# Altium PCB PCB1.PcbDoc
Units mil, origin at the board's own origin, x right, y up, seen from the top; angles counter-clockwise.
Board outline 6000 x 4000 mil, 2 copper layers (Top Layer, Bottom Layer); 75 components, 69 nets, 350 pads, 2 vias.
Unrouted connection lines stored in the file: 209.
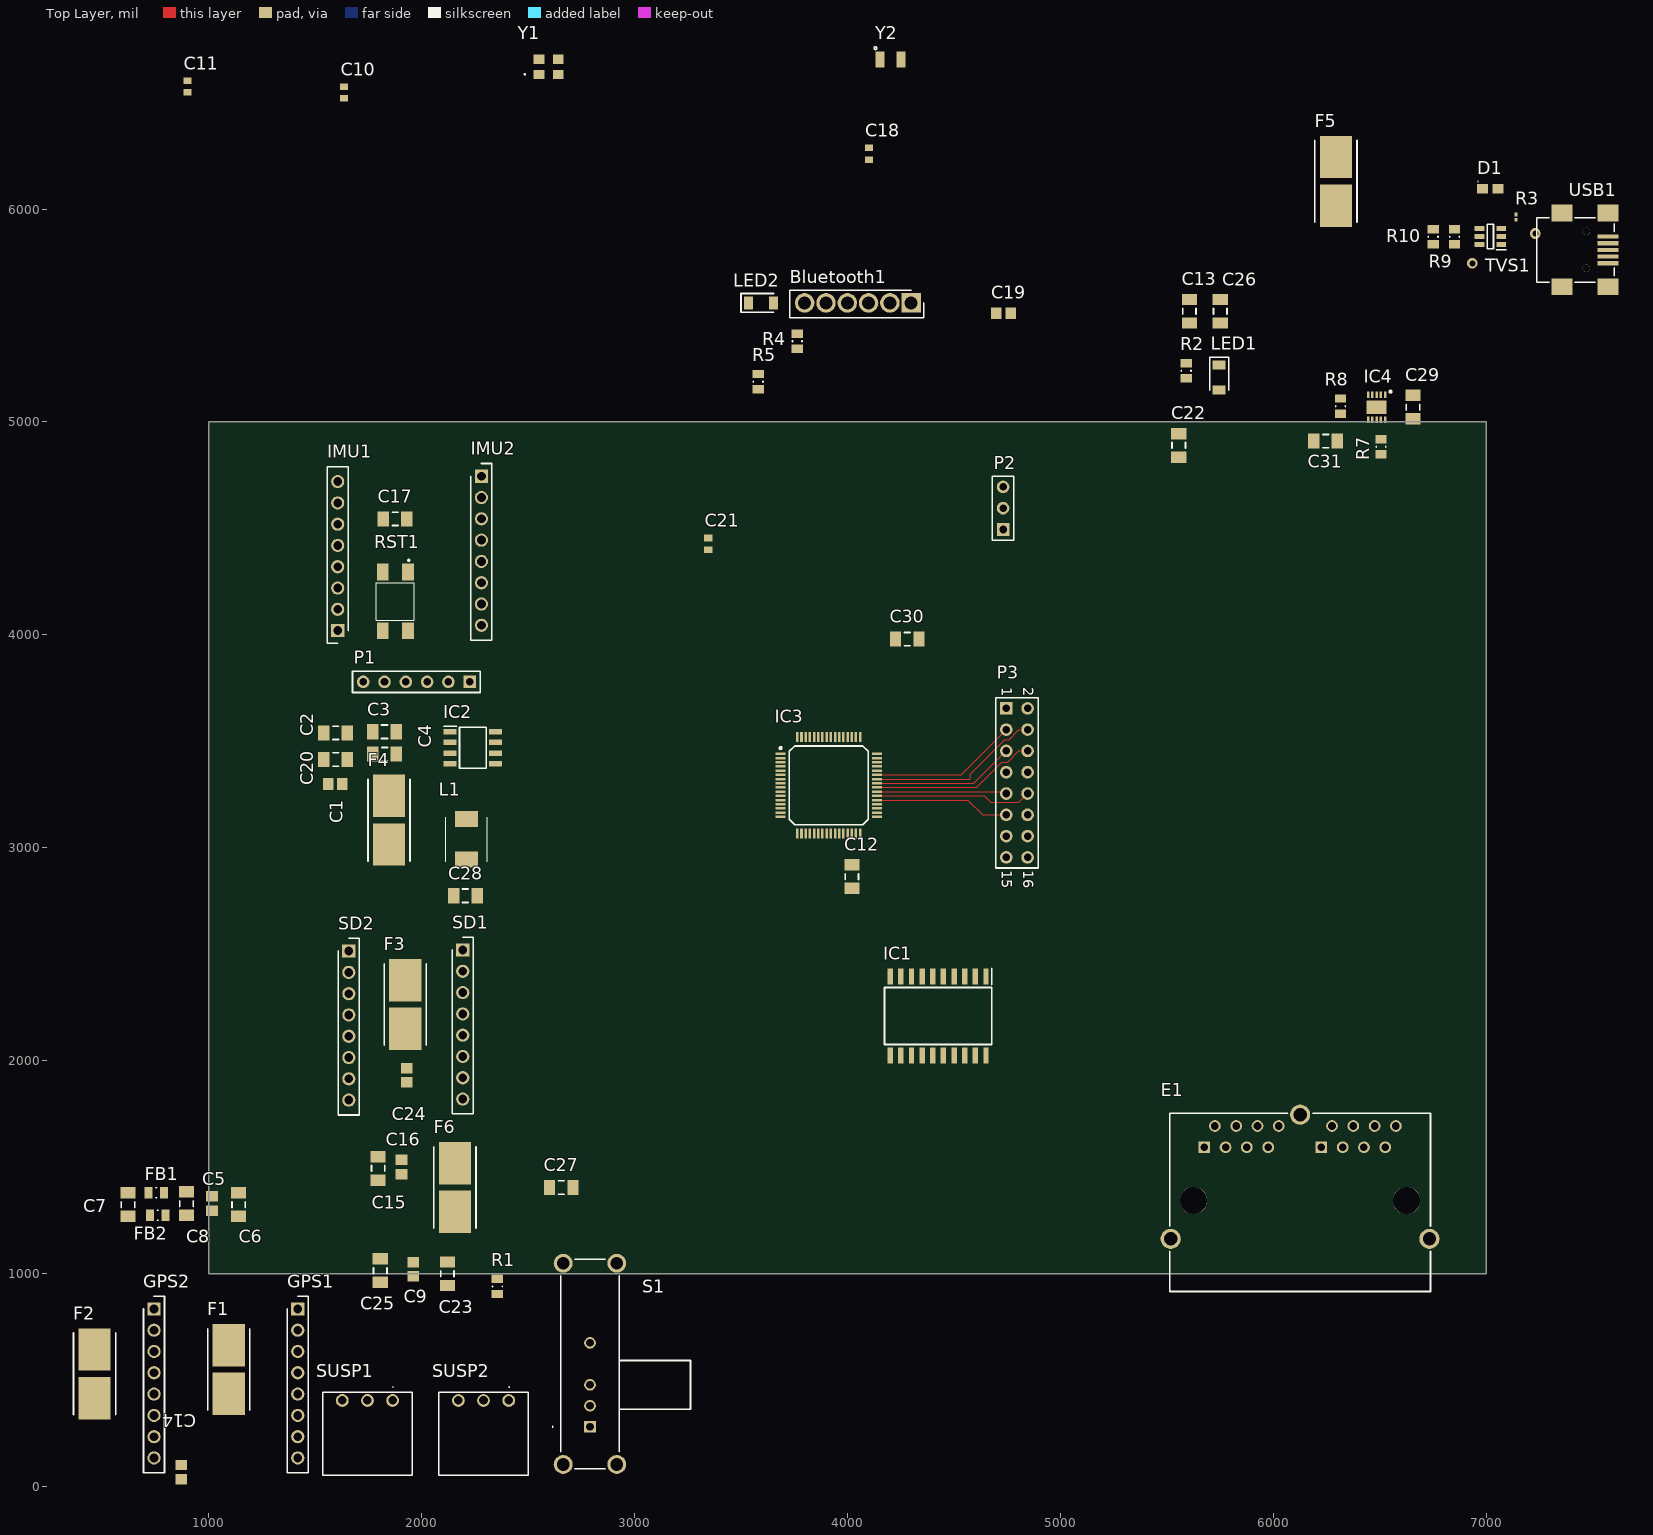
[diagram p0: Top Layer view]
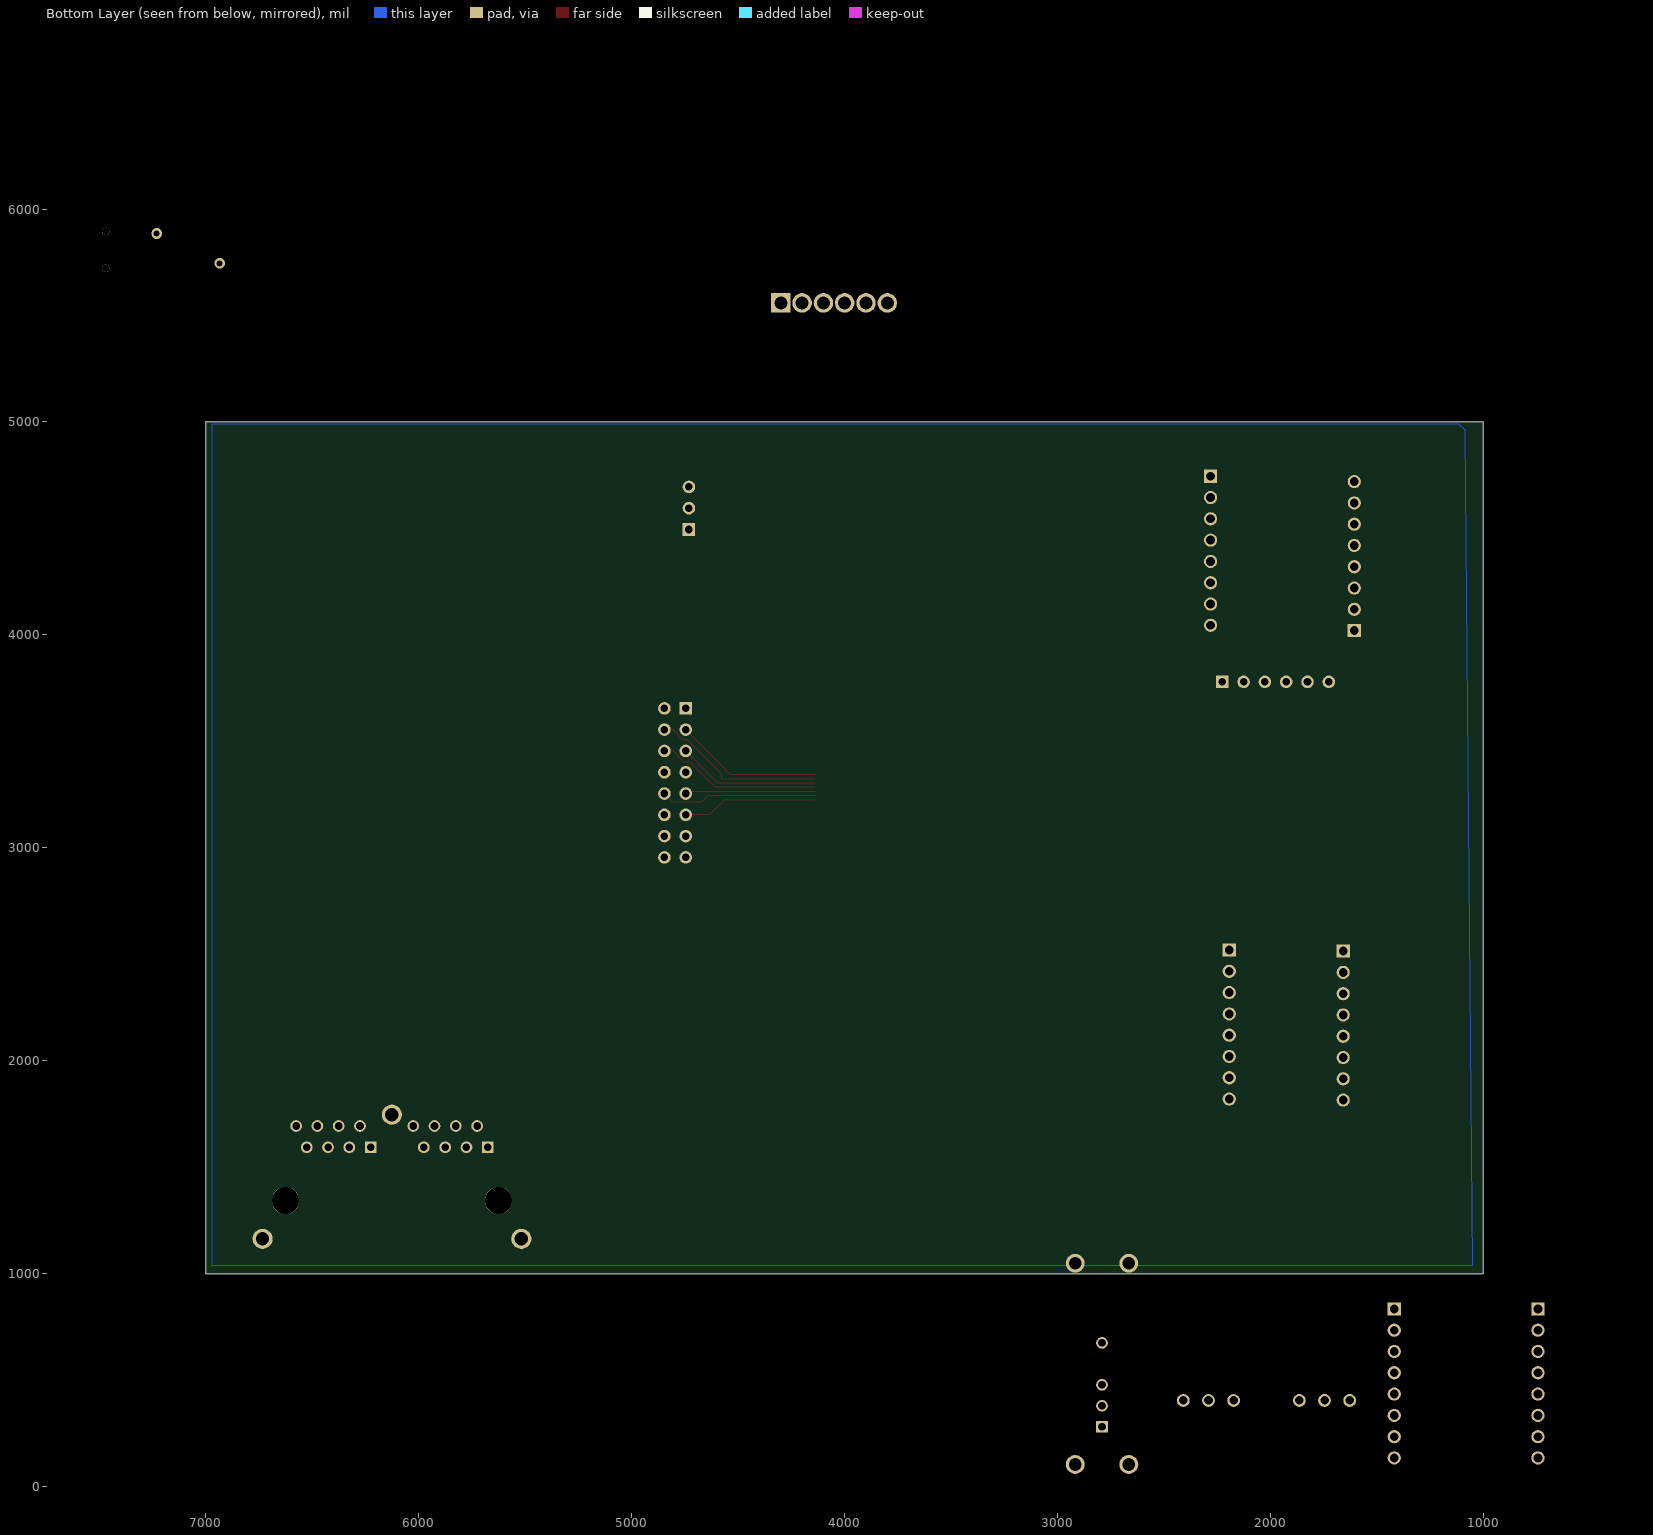
[diagram p1: Bottom Layer view, seen from below]

## Layer stack, top to bottom
Top Solder: solder mask 0.4, Solder Resist, Dk 3.5
Top Layer: signal copper 1.4
Dielectric 1: dielectric 12.6, FR-4, Dk 4.8
Bottom Layer: signal copper 1.4
Bottom Solder: solder mask 0.4, Solder Resist, Dk 3.5

## Board outline
1000,1000 7000,1000 7000,5000 1000,5000

## Design rules (kind name [scope] priority, off if disabled: settings)
Clearance [All] p1: gap=10 ignorepadtopadclearanceinfootprint=TRUE except(0: Arc-Hole Track-Hole SMDPad-Hole THPad-Hole Via-Hole Fill-Hole Poly-Hole Region-Hole Text-Hole)
DiffPairsRouting [All] p1: maxlimit=10 minlimit=10 mostfreqgap=10 toplayer_minwidth=15 toplayer_maxwidth=15 toplayer_prefwidth=15 bottomlayer_minwidth=15 bottomlayer_maxwidth=15 bottomlayer_prefwidth=15 maxuncoupledlength=500
PolygonConnect [All] p1: connectstyle=Relief reliefconductorwidth=10 reliefentries=4 polygonreliefangle="90 Angle" airgapwidth=10
RoutingVias [All] p1: holewidth=28 width=50 viastyle="Through Hole" minholewidth=28 minwidth=50 maxholewidth=28 maxwidth=50
SolderMaskExpansion [All] p1: expansion=4
Width [All] p1: maxlimit=10 minlimit=5 preferedwidth=5 minimp=50.000000 maximp=50.000000 favimp=50.000000
29 further rules are at their usual default settings.

## Classes and differential pairs
component class Supply: C26 C27 C28 C29 C30 C31 D1 F6 IC2 IC4 L1 R3 R7 R8 USB1
component class MCU: C9 C10 C11 C12 C13 C14 C15 C16 C17 C19 C20 C22 C23 IC3 LED1 P1 P2 P3 R2 R5 RST1 Y1 Y2
component class Componentes: F1 F2 F3 F4 F5 GPS1 GPS2 IMU1 IMU2 LED2 R4 SD1 SD2 SUSP1 SUSP2
component class CAN: C1 C2 C3 C4 C5 C6 C7 C8 E1 FB1 FB2 IC1 R1 S1
differential pair CAN: +CAN_P -CAN_N

## Components (designator, comment, footprint, x,y, rotation, side; value= is the part's Value field where it differs from the comment)
Bluetooth1 "61300611821" RHDR6W97P0X254_1X6_1574X250X865P 4298.46,5559.21 r180 top
C1 "10nF,+3.3V" "C 0805" 1593.46,3300 r180 top
C2 "100nF,+3.3V" "C 1206" 1595.12,3540 r180 top
C3 "100nF,+5V" "C 1206" 1824.88,3545 r0 top
C4 "10uF, +5V" "C 1206" 1825.12,3440 r0 top
C5 "10nF,+5V" "C 0805" 1015,1329.45 r90 top
C6 "100nF,+5V" "C 1206" 1140,1324.33 r90 top
C7 "100nF,+5V" "C 1206" 620,1324.33 r90 top
C8 "10uF, +5V" "C 1206" 895,1329.33 r90 top
C9 "Cap" "C 0805" 1960,1020.98 r270 top
C10 "885012207126" CAPC1608X90N 1635,6547.44 r90 top
C11 "885012207126" CAPC1608X90N 900,6575 r90 top
C12 "4.7uF" "C 1206" 4020,2865 r90 top
C13 "Cap" "C 1206" 5605,5520 r90 top
C14 "Cap" "C 0805" 870,67.91 r270 top
C15 "Cap" "C 1206" 1795,1494.33 r90 top
C16 "Cap" "C 0805" 1905,1501.46 r90 top
C17 "06035C104JAT2A" "C 1206" 1874.88,4545 r180 top
C18 "885012207126" CAPC1608X90N 4100,6260 r90 top
C19 "Cap" "C 0805" 4731.89,5510 r180 top
C20 "Cap" "C 1206" 1595.12,3415 r180 top
C21 "885012207126" CAPC1608X90N 3345,4427.44 r90 top
C22 "Cap" "C 1206" 5555,4889.88 r90 top
C23 "Cap" "C 1206" 2120,999.33 r90 top
C24 "Cap" "C 0805" 1929.01,1931.54 r90 top value=10nF
C25 "Cap" "C 1206" 1805,1014.33 r270 top value=1uF
C26 "10uF" "C 1206" 5750,5519.88 r90 top
C27 "100nF, 25V" "C 1206" 2654.88,1405 r180 top
C28 "0.1uF, 25V" "C 1206" 2205,2775 r0 top
C29 "4.7pF, 25V" "C 1206" 6655,5070 r90 top
C30 "10uF,25V" "C 1206" 4280,3980 r180 top
C31 "2.2pF, 25V" "C 1206" 6244.88,4910 r0 top
D1 "Valor" "LED 0805" 7018.58,6095 r0 top
E1 "615016137621" Ethernet2 6125,1335 r0 top
F1 "015401.5DR" "Fuse Holder" 1092.48,549.49 r270 top
F2 "015401.5DR" "Fuse Holder" 462.48,529.49 r270 top
F3 "015401.5DR" "Fuse Holder" 1921.49,2264.22 r270 top
F4 "015401.5DR" "Fuse Holder" 1845.12,3130 r270 top
F5 "015401.5DR" "Fuse Holder" 6294.45,6130.04 r90 top
F6 "015401.5DRT" "Fuse Holder" 2155,1404.45 r270 top
FB1 "1800Ohm, 1A" "F 0805" 753.58,1379.45 r0 top
FB2 "1800Ohm, 1A" "F 0805" 760,1274.45 r0 top
GPS1 "5-535541-6" RHDR8W60P0X254_1X8_2082X250X850P 1417.48,834.49 r270 top
GPS2 "5-535541-6" RHDR8W60P0X254_1X8_2082X250X850P 742.48,834.49 r270 top
IC1 "ADM3053BRWZ" SOIC127P1032X265-20N 4425,2210 r270 top
IC2 "LD1117D33TR" SOIC127P600X175-8N 2240,3470 r0 top
IC3 "STM32F446RET7" "Pins 1.2mm" 3911.38,3293.38 r0 top
IC4 "MAX16903SATB50_V+T" SON50P300X300X80-11N 6484.69,5069.06 r270 top
IMU1 "5-535541-6" RHDR8W60P0X254_1X8_2082X250X850P 1605,4020 r90 top
IMU2 "5-535541-6" RHDR8W60P0X254_1X8_2082X250X850P 2280,4745 r270 top
L1 "4.7uH" MPX1D0530L150 2210,3040 r90 top
LED1 "150120GS75000" LEDC3214X78N 5745,5209.06 r270 top
LED2 "150120GS75000" LEDC3214X78N 3593.46,5559.21 r0 top
P1 "Header 6" HDR1X6 2225,3779.57 r180 top
P2 "Header 3" HDR1X3 4730,4495 r90 top
P3 "Header 8X2" HDR2X8 4745,3655 r270 top
R1 "120R,+5V" "R 0805" 2355,939.88 r270 top
R2 "LED3.3V" "R 0805" 5590,5240 r90 top
R3 "1k" "R 0201" 7140,5962.2 r90 top
R4 "LED3.3V" "R 0805" 3763.46,5379.21 r90 top
R5 "10K" "R 0805" 3580,5189.57 r90 top
R7 "33k" "R 0805" 6505,4883.62 r90 top
R8 "20k" "R 0805" 6315,5074.57 r270 top
R9 "22Ohm" "R 0805" 6850,5869.57 r90 top
R10 "22Ohm" "R 0805" 6750,5869.57 r90 top
RST1 "430181038816" 430181038816 1875.94,4157.2 r270 top
S1 "MSS1300R04" MSS1300R04 2790,281.02 r90 top
SD1 "5-535541-6" RHDR8W60P0X254_1X8_2082X250X850P 2192.48,2520.04 r270 top
SD2 "5-535541-6" RHDR8W60P0X254_1X8_2082X250X850P 1657.48,2515.04 r270 top
SUSP1 "66200311022" 66200311022 1863.11,404.57 r0 top
SUSP2 "66200311022" 66200311022 2408.11,404.53 r0 top
TVS1 "USBLC6-4SC6" SOT95P280X145-6N 7018.82,5871.38 r180 top
USB1 "WE-Communication Connectors 651005136421" 65100516121 7469.17,5894.84 r270 top
Y1 "ECS-80-12-33-JGN-TR" ECS801233JGNTR 2595.94,6667.8 r0 top
Y2 "ECS-.327-12.5-34B" ECX-31B 4200.94,6702.8 r0 top

## Footprints (in the part's own frame and the unit in brackets; to place one, negate y for a bottom-side part, rotate by r counter-clockwise, add the part's x,y. Pads: shape width x height; smd on the part's side, far side on the other; paste and mask are expansions set on the pad)
65100516121 [mm]
  rect 0.5x2.5 smd: 1(0.6,2.6) 2(1.4,2.6) 3(2.2,2.6) 4(3,2.6) 5(3.8,2.6)
  rect 2x2.5 smd: ""(-2.2,2.6) ""(-2.2,-2.9) ""(6.6,-2.9) ""(6.6,2.6)
  round 0.9 hole 0.9 unplated: ""(0,0) ""(4.4,0)
  silkscreen extent -1.65,-5.9 6.05,3.35, body extent -2.6,-5.9 7,3.35, height 3.92
66200311022 [mm]
  round 1.53 hole 1.02: 1(0,0) 2(-3,0) 3(-6,0)
  round 1.5 hole 3 unplated: MH1(-3,-4.32)
  silkscreen extent -8.32,-8.92 2.32,1.65, body extent -8.32,-8.92 2.32,0.98, height 5.82
430181038816 [mm]
  rect 2x1.4 smd: 1(-3.5,1.5) 2(3.5,1.5) 3(-3.5,-1.5) 4(3.5,-1.5)
  silkscreen extent -5,-2.25 2.25,2.25
"C 0805" [mm] "Chip Capacitor, 2-Leads, Body 2,00x1,25mm, IPC Medium Density"
  rect 1.25x1.4 smd: 1(-0.85,0) 2(0.85,0)
  body extent -1.08,-0.67 1.07,0.67, height 0.9
"C 1206" [mm] "Chip Capacitor, 2-Leads, Body 3,20x1,60mm, IPC Medium Density"
  rect 1.35x1.8 smd: 1(-1.4,0) 2(1.4,0)
  silkscreen extent -0.35,-0.8 0.35,0.8, body extent -1.68,-0.87 1.68,0.87, height 0.9
CAPC1608X90N [mm]
  rect 0.78x0.99 smd: 1(-0.7,0) 2(0.7,0)
  body extent -0.8,-0.41 0.8,0.41, height 0.9
ECS801233JGNTR [mm]
  rect 1.3x1.1 smd: 1(-1.15,-0.9) 2(1.15,-0.9) 3(1.15,0.9) 4(-1.15,0.9)
  silkscreen extent -2.9,-0.95 -2.8,-0.85, body extent -1.69,-1.34 1.69,1.34, height 0.9
ECX-31B [mm]
  rect 1.1x1.9 smd: 1(-1.25,0) 2(1.25,0)
  silkscreen extent -1.94,1.19 -1.63,1.51, body extent -1.6,-0.75 1.6,0.75, height 0.9
Ethernet2 [mm]
  rect 1.4x1.4 hole 0.9: A1(-11.43,6.565) B1(2.54,6.565)
  round 1.4 hole 0.9: A2(-10.16,9.105) A3(-8.89,6.565) A4(-7.62,9.105) A5(-6.35,6.565) A6(-5.08,9.105) A7(-3.81,6.565) A8(-2.54,9.105) B2(3.81,9.105) B3(5.08,6.565) B4(6.35,9.105) B5(7.62,6.565) B6(8.89,9.105) B7(10.16,6.565) B8(11.43,9.105)
  round 3.25 hole 3.25 unplated: MH1(-12.7,0.215) MH2(12.7,0.215)
  round 2.4 hole 1.6: S1(-15.435,-4.355) S2(15.435,-4.355) S3(0,10.455)
  silkscreen extent -15.56,-10.64 15.56,10.63, body extent -15.57,-10.64 15.56,10.63, height 13.75
"F 0805" [mm] "Chip Resistor, 2-Leads, Body 2,00x1,25mm, IPC Medium Density"
  rect 0.95x1.4 smd: 1(-0.925,0) 2(0.925,0)
  silkscreen extent -0.05,-0.6 0.05,0.6, body extent -1.05,-0.7 1.05,0.7, height 0.55
"Fuse Holder" [mm]
  rect 5.05x3.85 smd: 1(-2.9,0.025) 2(2.9,0.025)
  silkscreen extent -4.86,-2.49 4.87,2.54, body extent -4.86,-2.51 4.87,2.52, height 3.82
HDR1X3 [mm] "Connector; Header; 3 Position"
  rect 1.5x1.5 hole 0.9: 1(0,0)
  round 1.5 hole 0.9: 2(2.54,0) 3(5.08,0)
  silkscreen extent -1.27,-1.27 6.35,1.27
HDR1X6 [mm] "Connector; Header; 6 Position"
  rect 1.5x1.5 hole 0.9: 1(0,0)
  round 1.5 hole 0.9: 2(2.54,0) 3(5.08,0) 4(7.62,0) 5(10.16,0) 6(12.7,0)
  silkscreen extent -1.27,-1.27 13.97,1.27
HDR2X8 [mm] "Connector; Header; 8x2 Position"
  rect 1.5x1.5 hole 0.9: 1(0,0)
  round 1.5 hole 0.9: 2(0,2.54) 3(2.54,0) 4(2.54,2.54) 5(5.08,0) 6(5.08,2.54) 7(7.62,0) 8(7.62,2.54) 9(10.16,0) 10(10.16,2.54) 11(12.7,0) 12(12.7,2.54) 13(15.24,0) 14(15.24,2.54) 15(17.78,0) 16(17.78,2.54)
  silkscreen extent -1.27,-1.27 19.05,3.81
"LED 0805" [mm] "Molded Diode, 2-Leads, Body 2,00x1,25mm, IPC Medium Density"
  rect 1.3x1.15 smd: 1(-0.925,0) 2(0.925,0)
  silkscreen extent -1.52,0.83 -1.42,0.92, body extent -1.05,-0.67 1.05,0.67, height 1.1
LEDC3214X78N [mm]
  rect 1.1x1.55 smd: 1(-1.5,0) 2(1.5,0)
  silkscreen extent -2.4,-1.12 1.5,1.12, body extent -1.6,-0.8 1.6,0.8, height 0.68
MPX1D0530L150 [mm]
  rect 1.905x2.79 smd: 1(-2.425,0) 2(2.425,0)
  silkscreen extent -2.65,-2.5 2.65,2.5, body extent -3.19,-2.5 3.19,2.5, height 3.1
MSS1300R04 [mm]
  rect 1.4x1.4 hole 0.9: 1(0,0)
  round 1.4 hole 0.9: 2(2.5,0) 3(5,0) 4(10,0)
  round 2.25 hole 1.5: MH1(-4.5,-3.2) MH2(-4.5,3.2) MH3(19.5,3.2) MH4(19.5,-3.2)
  silkscreen extent -5,-12 20,4.5, body extent -5.14,-3.85 20.15,3.85, height 11.4
"Pins 1.2mm" [mm] "CQFP, 64-Leads, Body 12,00x12,00mm, Pitch 0,50mm, IPC Medium Density"
  rect 1.2x0.3 smd: 1(-5.75,3.75) 2(-5.75,3.25) 3(-5.75,2.75) 4(-5.75,2.25) 5(-5.75,1.75) 6(-5.75,1.25) 7(-5.75,0.75) 8(-5.75,0.25) 9(-5.75,-0.25) 10(-5.75,-0.75) 11(-5.75,-1.25) 12(-5.75,-1.75) 13(-5.75,-2.25) 14(-5.75,-2.75) 15(-5.75,-3.25) 16(-5.75,-3.75) 33(5.75,-3.75) 34(5.75,-3.25) 35(5.75,-2.75) 36(5.75,-2.25) 37(5.75,-1.75) 38(5.75,-1.25) 39(5.75,-0.75) 40(5.75,-0.25) 41(5.75,0.25) 42(5.75,0.75) 43(5.75,1.25) 44(5.75,1.75) 45(5.75,2.25) 46(5.75,2.75) 47(5.75,3.25) 48(5.75,3.75)
  rect 0.3x1.2 smd: 17(-3.75,-5.75) 18(-3.25,-5.75) 19(-2.75,-5.75) 20(-2.25,-5.75) 21(-1.75,-5.75) 22(-1.25,-5.75) 23(-0.75,-5.75) 24(-0.25,-5.75) 25(0.25,-5.75) 26(0.75,-5.75) 27(1.25,-5.75) 28(1.75,-5.75) 29(2.25,-5.75) 30(2.75,-5.75) 31(3.25,-5.75) 32(3.75,-5.75) 49(3.75,5.75) 50(3.25,5.75) 51(2.75,5.75) 52(2.25,5.75) 53(1.75,5.75) 54(1.25,5.75) 55(0.75,5.75) 56(0.25,5.75) 57(-0.25,5.75) 58(-0.75,5.75) 59(-1.25,5.75) 60(-1.75,5.75) 61(-2.25,5.75) 62(-2.75,5.75) 63(-3.25,5.75) 64(-3.75,5.75)
  silkscreen extent -5.87,-4.7 4.7,4.7, body extent -5,-5 5,5, height 1.6
"R 0201" [mm] "Chip Resistor, 2-Leads, Body 0,60x0,30mm, IPC Medium Density"
  rect 0.45x0.35 smd: 1(-0.325,0) 2(0.325,0)
  body extent -0.32,-0.16 0.32,0.17, height 0.26
"R 0805" [mm] "Chip Resistor, 2-Leads, Body 2,00x1,25mm, IPC Medium Density"
  rect 1x1.35 smd: 1(-0.9,0) 2(0.9,0)
  silkscreen extent -0.05,-0.58 0.05,0.58, body extent -1.05,-0.67 1.05,0.67, height 0.6
RHDR6W97P0X254_1X6_1574X250X865P [mm]
  rect 2.325x2.325 hole 1.55: 1(0,0)
  round 2.325 hole 1.55: 2(2.54,0) 3(5.08,0) 4(7.62,0) 5(10.16,0) 6(12.7,0)
  silkscreen extent -1.52,-1.51 14.47,1.78, body extent -1.52,-1.25 14.22,1.25, height 8.65
RHDR8W60P0X254_1X8_2082X250X850P [mm]
  rect 1.575x1.575 hole 1.05: 1(0,0)
  round 1.575 hole 1.05: 2(2.54,0) 3(5.08,0) 4(7.62,0) 5(10.16,0) 6(12.7,0) 7(15.24,0) 8(17.78,0)
  silkscreen extent -1.52,-1.25 19.55,1.25, body extent -1.52,-1.25 19.3,1.25, height 8.5
SOIC127P600X175-8N [mm]
  rect 1.525x0.65 smd: 1(-2.712,1.905) 2(-2.712,0.635) 3(-2.712,-0.635) 4(-2.712,-1.905) 5(2.712,-1.905) 6(2.712,-0.635) 7(2.712,0.635) 8(2.712,1.905)
  silkscreen extent -3.47,-2.45 1.6,2.58, body extent -3,-2.45 3,2.45, height 1.75
SOIC127P1032X265-20N [mm]
  rect 1.925x0.65 smd: 1(-4.712,5.715) 2(-4.712,4.445) 3(-4.712,3.175) 4(-4.712,1.905) 5(-4.712,0.635) 6(-4.712,-0.635) 7(-4.712,-1.905) 8(-4.712,-3.175) 9(-4.712,-4.445) 10(-4.712,-5.715) 11(4.712,-5.715) 12(4.712,-4.445) 13(4.712,-3.175) 14(4.712,-1.905) 15(4.712,-0.635) 16(4.712,0.635) 17(4.712,1.905) 18(4.712,3.175) 19(4.712,4.445) 20(4.712,5.715)
  silkscreen extent -5.68,-6.4 3.4,6.4, body extent -5.16,-6.4 5.16,6.4, height 2.65
SON50P300X300X80-11N [mm]
  rect 0.75x0.3 smd: 1(-1.5,1) 2(-1.5,0.5) 3(-1.5,0) 4(-1.5,-0.5) 5(-1.5,-1) 6(1.5,-1) 7(1.5,-0.5) 8(1.5,0) 9(1.5,0.5) 10(1.5,1)
  rect 1.6x2.4 smd: 11(0,0)
  silkscreen extent -2,1.53 -1.75,1.78, body extent -1.55,-1.5 1.55,1.5, height 0.8
SOT95P280X145-6N [mm]
  rect 1.15x0.6 smd: 1(-1.3,0.95) 2(-1.3,0) 3(-1.3,-0.95) 4(1.3,-0.95) 5(1.3,0) 6(1.3,0.95)
  silkscreen extent -1.88,-1.46 0.38,1.6, body extent -1.4,-1.46 1.4,1.46, height 1.45

## Part data
Bluetooth1: "Connector", Manufacturer_Name="Wurth Elektronik", Mouser Part Number=710-61300611821, Datasheet Link=https://www.we-online.de/katalog/datasheet/61300611821.pdf, Height=8.65mm, Manufacturer_Part_Number=61300611821, Mouser Price/Stock=https://www.mouser.co.uk/ProductDetail/Wurth-Elektronik/61300611821?qs=iLbezkQI%252BsgS21jF2eozhA%3D%3D
C1 C5: library part 885012207126_6, "WCAP-CSGP Multilayer Ceramic Chip Capacitor, General Purpose, size 0805, X7R, 47nF, 100V", Capacitance=47nF, Capacitance Tolerance=+/-10%, Isolation Resistance=>=2.1GOhm, Manufacturer="Wurth Elektronik", Manufacturer Part Number=885012207126, Operating Temperature="-55 to +125degC", Rated Voltage=100VDC, Ceramic Type=X7R, ComponentLink1Description=Manufacturer, ComponentLink1URL=http://www.we-online.de, ComponentLink2Description=Datasheet, ComponentLink2URL=https://www.we-online.com/catalog/datasheet/885012207126.pdf, Dissipation Factor=#NAME?, Height=1.25mm, Mounting Technology=SMT, Packaging="Tape and Reel", Published Date="May 2020", Size=0805, Technical Reference=X7R0805473K100DFCT10000
C2: library part 885012208015_1, "WCAP-CSGP General Purpose Ceramic Capacitors, size 1206, 2.2uF, +/-10%, 10VDC", Capacitance=2.2uF, Capacitance Tolerance=+/-10%, Isolation Resistance=>=0.2GOhm, Operating Temperature="-55 to +125degC", Part Number=885012208015, Rated Voltage=10VDC, Ceramic Type=X7R, ComponentLink1Description=Manufacturer, ComponentLink1URL=http://www.we-online.de, ComponentLink2Description=Datasheet, ComponentLink2URL=https://katalog.we-online.com/pbs/datasheet/885012208015.pdf, Dissipation Factor=#NAME?, Height="1.15mm +/-0.15mm", Mounting Technology=SMT, Packaging="Tape and Reel", Published Date="August 2019", Publisher="Wurth Elektronik", Size=1206, Technical Reference=X7R1206225K010DFCT10000
C3 C6 C7: library part 885012208013_4, "WCAP-CSGP General Purpose Ceramic Capacitors, size 1206, 1uF, +/-10%, 10VDC", Capacitance=1uF, Capacitance Tolerance=+/-10%, Isolation Resistance=>=0.5GOhm, Operating Temperature="-55 to +125degC", Part Number=885012208013, Rated Voltage=10VDC, Ceramic Type=X7R, ComponentLink1Description=Manufacturer, ComponentLink1URL=http://www.we-online.de, ComponentLink2Description=Datasheet, ComponentLink2URL=https://katalog.we-online.com/pbs/datasheet/885012208013.pdf, Dissipation Factor=#NAME?, Height="1.15mm +/-0.15mm", Mounting Technology=SMT, Packaging="Tape and Reel", Published Date="August 2019", Publisher="Wurth Elektronik", Size=1206, Technical Reference=X7R1206105K010DFCT10000
C4 C8: library part 885012208013_5, "WCAP-CSGP General Purpose Ceramic Capacitors, size 1206, 1uF, +/-10%, 10VDC", Capacitance=1uF, Capacitance Tolerance=+/-10%, Isolation Resistance=>=0.5GOhm, Operating Temperature="-55 to +125degC", Part Number=885012208013, Rated Voltage=10VDC, Ceramic Type=X7R, ComponentLink1Description=Manufacturer, ComponentLink1URL=http://www.we-online.de, ComponentLink2Description=Datasheet, ComponentLink2URL=https://katalog.we-online.com/pbs/datasheet/885012208013.pdf, Dissipation Factor=#NAME?, Height="1.15mm +/-0.15mm", Mounting Technology=SMT, Packaging="Tape and Reel", Published Date="August 2019", Publisher="Wurth Elektronik", Size=1206, Technical Reference=X7R1206105K010DFCT10000
C9 C12 C13 C14 C15 C16 C19 C20 C22 C23 C26 C27 C28 C29 C30 C31: library part Condensador, "Condensador"
C10 C11 C18 C21: "Capacitor", Manufacturer_Name="Wurth Elektronik", Mouser Part Number=710-885012207126, Datasheet Link=https://katalog.we-online.com/pbs/datasheet/885012207126.pdf, Height=1.35mm, Manufacturer_Part_Number=885012207126, Mouser Price/Stock=https://www.mouser.co.uk/ProductDetail/Wurth-Elektronik/885012207126?qs=MLItCLRbWsx1mdA6iQ1T9Q%3D%3D
C17: "Capacitor", Manufacturer_Name=AVX, Mouser Part Number=581-06035C104JAT2A, Arrow Part Number=06035C104JAT2A, Arrow Price/Stock=https://www.arrow.com/en/products/06035c104jat2a/avx, Datasheet Link=http://www.mouser.com/catalog/supplier/library/pdf/AVXSurfaceMountCeramic.pdf, Height=0.9mm, Manufacturer_Part_Number=06035C104JAT2A, Mouser Price/Stock=https://www.mouser.co.uk/ProductDetail/AVX/06035C104JAT2A/?qs=EbDiPP9peV%252BVb%2FIEcsjONQ%3D%3D
C24 C25: "Capacitor", LatestRevisionDate=17-Jul-2002, LatestRevisionNote="Re-released for DXP Platform.", PackageDescription="Radial Cap, Thru-Hole; 2 Leads; 0.3 in Pin Spacing", PackageReference=RAD-0.3, Published=8-Jun-2000, Publisher="Altium Limited"
D1: library part LED, "LED"
E1: "WR-MJ Modular Jack THT Horizontal Shielded Dual Port 8P8C Tab Down", Contact Resistance=20mOhm, Insulation Resistance=500MOhm, Operating Temperature="-40 to +85degC", Rated Current=1.5A, Withstanding Voltage=1000VAC, Working Voltage=120VAC, ComponentLink1Description=Manufacturer, ComponentLink1URL=http://www.we-online.de, ComponentLink2Description=Datasheet, ComponentLink2URL=https://katalog.we-online.com/em/datasheet/615016137621.pdf, Mounting Technology=THT, Packaging=Tray, Part Number=615016137621, Published Date="November 2019", Publisher="Wurth Elektronik", Type=Horizontal, xPxC=8P8C
F1 F2 F3 F4 F5: "Fuse", Manufacturer_Name=LITTELFUSE, Mouser Part Number=576-015401.5DR, RS Part Number=7382879P, Allied_Number=70519132, Allied Price/Stock=https://www.alliedelec.com/littelfuse-015401-5dr/70519132/, Datasheet Link=https://www.littelfuse.com/~/media/electronics/datasheets/fuses/littelfuse_fuse_154_154t_154l_154tl_datasheet.pdf.pdf, Height=3.81mm, Manufacturer_Part_Number=015401.5DR, Mouser Price/Stock=https://www.mouser.com/Search/Refine.aspx?Keyword=576-015401.5DR, RS Price/Stock=http://uk.rs-online.com/web/p/products/7382879P
F6: "Fuse", Manufacturer_Name=LITTELFUSE, Mouser Part Number=576-015401.5DRT, Arrow Part Number=015401.5DRT, Arrow Price/Stock=https://www.arrow.com/en/products/015401.5drt/littelfuse?region=nac, Datasheet Link=https://componentsearchengine.com/Datasheets/2/015401.5DRT.pdf, Height=3.81mm, Manufacturer_Part_Number=015401.5DRT, Mouser Price/Stock=https://www.mouser.co.uk/ProductDetail/Littelfuse/015401.5DRT?qs=gu7KAQ731USSn8iq6YrVPw%3D%3D
FB1 FB2: library part 742792090, "WE-CBF SMT EMI Suppression Ferrite Bead, size 0805, 1800Ohm, 1A", DC Resistance max.=0.4Ohm, Manufacturer="Wurth Elektronik", Operating Temperature="-55 to +125degC", Rated Current=1A, ComponentLink1Description=Manufacturer, ComponentLink1URL=http://www.we-online.de, ComponentLink2Description=Datasheet, ComponentLink2URL=https://www.we-online.com/catalog/datasheet/742792090.pdf, Impedance @100MHz=1800Ohm, Impedance max.=2000Ohm, Manufacturer Part Number=742792090, Mounting Technology=SMT, Packaging="Tape and Reel", Published Date="March 2020", Size=0805, Type="Wide Band"
GPS1 GPS2 IMU1 IMU2 SD1 SD2: "Connector Socket Strip RCP 8 POS 2.54mm Solder ST Thru-Hole Gang of Tubes", Package=None, Availability=Unavailable, MF="TE Connectivity", MP=5-535541-6, Price=None, SnapEDA_Link=https://www.snapeda.com/parts/5-535541-6/TE%20Connectivity%20AMP%20Connectors/view-part/497141/?ref=snap
IC1: "Integrated Circuit", Manufacturer_Name="Analog Devices", Mouser Part Number=584-ADM3053BRWZ, Arrow Part Number=ADM3053BRWZ, Arrow Price/Stock=https://www.arrow.com/en/products/adm3053brwz/analog-devices?region=nac, Datasheet Link=https://componentsearchengine.com/Datasheets/2/ADM3053BRWZ.pdf, Height=2.65mm, Manufacturer_Part_Number=ADM3053BRWZ, Mouser Price/Stock=https://www.mouser.co.uk/ProductDetail/Analog-Devices/ADM3053BRWZ?qs=BpaRKvA4VqGZYG1hZ9cdqw%3D%3D
IC2: "Integrated Circuit", Manufacturer_Name=STMicroelectronics, Mouser Part Number=511-LD1117D33-TR, Arrow Part Number=LD1117D33TR, Arrow Price/Stock=https://www.arrow.com/en/products/ld1117d33tr/stmicroelectronics, Datasheet Link=http://www.st.com/st-web-ui/static/active/en/resource/technical/document/datasheet/CD00000544.pdf, Height=1.75mm, Manufacturer_Part_Number=LD1117D33TR, Mouser Price/Stock=https://www.mouser.co.uk/ProductDetail/STMicroelectronics/LD1117D33TR?qs=8YYpzd7qSxIl%2FiC6F%2FA2nA%3D%3D
IC3: "Integrated Circuit", Manufacturer_Name=STMicroelectronics, Mouser Part Number=511-STM32F446RET7, Arrow Part Number=STM32F446RET7, Arrow Price/Stock=https://www.arrow.com/en/products/stm32f446ret7/stmicroelectronics?region=nac, Datasheet Link=https://componentsearchengine.com/Datasheets/5/STM32F446RET7.pdf, Height=1.6mm, Manufacturer_Part_Number=STM32F446RET7, Mouser Price/Stock=https://www.mouser.co.uk/ProductDetail/STMicroelectronics/STM32F446RET7?qs=qzCNEk%252BRr%252BZ3vIhuSM4Ejg%3D%3D
IC4: "Integrated Circuit", Manufacturer_Name="Maxim Integrated", Manufacturer_Part_Number=MAX16903SATB50/V+T, Datasheet Link=https://pdfserv.maximintegrated.com/en/ds/MAX16903.pdf, Height=0.8mm
L1: library part Inductor, "Inductor"
LED1 LED2: "LED", Manufacturer_Name="Wurth Elektronik", Mouser Part Number=710-150120GS75000, Height=0.78mm, Manufacturer_Part_Number=150120GS75000, Mouser Price/Stock=https://www.mouser.co.uk/ProductDetail/Wurth-Elektronik/150120GS75000?qs=LlUlMxKIyB3I3AMxrmBw4A%3D%3D
P1: "Header, 6-Pin", LatestRevisionDate=17-Jul-2002, LatestRevisionNote="Re-released for DXP Platform.", Publisher="Altium Limited"
P2: "Header, 3-Pin", LatestRevisionDate=17-Jul-2002, LatestRevisionNote="Re-released for DXP Platform.", Publisher="Altium Limited"
P3: "Header, 8-Pin, Dual row", LatestRevisionDate=17-Jul-2002, LatestRevisionNote="Re-released for DXP Platform.", Publisher="Altium Limited"
R1: library part 560050320011_9, "WRIS-KSKE SMT Thick Film Resistor, size 0805, 1Ohm, 0.33W", Manufacturer="Wurth Elektronik", Manufacturer Part Number=560050320011, Operating Temperature="-55 to +155degC", Rated Current=0.57A, Rated Power=0.33W, Resistance=1Ohm, Resistance Tolerance=+/-1%, Temperature Coefficient of Resistance=+/-100ppm/degC, ComponentLink1Description=Manufacturer, ComponentLink1URL=http://www.we-online.de, ComponentLink2Description=Datasheet, ComponentLink2URL=https://www.we-online.com/catalog/datasheet/560050320011.pdf, Height=0.6mm, Length=2mm, Mounting Technology=SMT, Packaging="Tape and Reel", Published Date="May 2020", Size=0805, Technical Reference=KE08051R00F103KAATP0000, Width=1.25mm
R2 R5 R9 R10: library part 560050320011, "WRIS-KSKE SMT Thick Film Resistor, size 0805, 1Ohm, 0.33W", Manufacturer="Wurth Elektronik", Operating Temperature="-55 to +155degC", Rated Current=0.57A, Rated Power=0.33W, Resistance=1Ohm, Resistance Tolerance=+/-1%, Temperature Coefficient of Resistance=+/-100ppm/degC, ComponentLink1Description=Manufacturer, ComponentLink1URL=http://www.we-online.de, ComponentLink2Description=Datasheet, ComponentLink2URL=https://www.we-online.com/catalog/datasheet/560050320011.pdf, Height=0.6mm, Length=2mm, Manufacturer Part Number=560050320011, Mounting Technology=SMT, Packaging="Tape and Reel", Published Date="May 2020", Size=0805, Technical Reference=KE08051R00F103KAATP0000, Width=1.25mm
R3 R7 R8: library part Resistencia, "Resistencia"
R4: library part 560050320011_2, "WRIS-KSKE SMT Thick Film Resistor, size 0805, 1Ohm, 0.33W", Manufacturer="Wurth Elektronik", Manufacturer Part Number=560050320011, Operating Temperature="-55 to +155degC", Rated Current=0.57A, Rated Power=0.33W, Resistance=1Ohm, Resistance Tolerance=+/-1%, Temperature Coefficient of Resistance=+/-100ppm/degC, ComponentLink1Description=Manufacturer, ComponentLink1URL=http://www.we-online.de, ComponentLink2Description=Datasheet, ComponentLink2URL=https://www.we-online.com/catalog/datasheet/560050320011.pdf, Height=0.6mm, Length=2mm, Mounting Technology=SMT, Packaging="Tape and Reel", Published Date="May 2020", Size=0805, Technical Reference=KE08051R00F103KAATP0000, Width=1.25mm
RST1: "WS-TASV SMT Tact Switch 4.5x4.5mm, height 3.8mm, 160gf", Operating Temperature="-40 to +85degC", Rated Current=50mA, Rated Voltage=12VDC, ComponentLink1Description=Manufacturer, ComponentLink1URL=http://www.we-online.de, ComponentLink2Description=Datasheet, ComponentLink2URL=https://katalog.we-online.com/em/datasheet/430181038816.pdf, Contact Material="Stainless Steel", Contact Plating=Silver, Height=3.8mm, Mounting Technology=SMT, Operation Force=160gf, Packaging="Tape and Reel", Part Number=430181038816, Published Date="September 2019", Publisher="Wurth Elektronik", Terminal Material="Copper Alloy", Terminal Plating=Silver, Washable=No
S1: "Switch", Manufacturer_Name="TE Connectivity", Mouser Part Number=506-MSS1300R04, Datasheet Link=https://www.te.com/commerce/DocumentDelivery/DDEController?Action=showdoc&DocId=Customer+Drawing%7F1825260%7FA2%7Fpdf%7FEnglish%7FENG_CD_1825260_A2.pdf%7F1825260-1, Height=11.3mm, Manufacturer_Part_Number=MSS1300R04, Mouser Price/Stock=https://www.mouser.co.uk/ProductDetail/TE-Connectivity-PB/MSS1300R04?qs=Of7OaoM7rsFDfSerl70TPw%3D%3D
SUSP1 SUSP2: "Connector", Manufacturer_Name="Wurth Elektronik", Mouser Part Number=710-66200311022, Datasheet Link=https://docs.rs-online.com/3e1f/A700000007269589.pdf, Height=5.72mm, Manufacturer_Part_Number=66200311022, Mouser Price/Stock=https://www.mouser.co.uk/ProductDetail/Wurth-Elektronik/66200311022?qs=3RJ0PdSuLVkSi7ZZT4Z8xA%3D%3D
TVS1: "Integrated Circuit", Manufacturer_Name=STMicroelectronics, Mouser2 Part Number=511-USBLC6-4SC6, Datasheet Link=https://componentsearchengine.com//USBLC6-4SC6.pdf, Height=1.45mm, Manufacturer_Part_Number=USBLC6-4SC6, Mouser2 Price/Stock=https://www.mouser.com/Search/Refine.aspx?Keyword=511-USBLC6-4SC6
USB1: "WR-COM Mini USB Vertical TH Type B 5 Contacts", Manufacturer="Würth Elektronik eiSos GmbH", partNo=651005136421, ComponentLink1 Description=Manufacturer, ComponentLink1URL=http://www.we-online.de, ComponentLink2 Description=Datasheet, ComponentLink2URL=http://katalog.we-online.de/em/datasheet/651005136421.pdf, Created by="Karrer Zheng", Created Date=10/10/2014, NoPins=5
Y1: "Crystal or Oscillator", Manufacturer_Name=ECS, Mouser Part Number=520-80-12-33-JGN-TR, Arrow Part Number=ECS-80-12-33-JGN-TR, Arrow Price/Stock=https://www.arrow.com/en/products/ecs-80-12-33-jgn-tr/ecs-international?region=nac, Datasheet Link=https://ecsxtal.com/store/pdf/ecx-32.pdf, Height=0.8mm, Manufacturer_Part_Number=ECS-80-12-33-JGN-TR, Mouser Price/Stock=https://www.mouser.co.uk/ProductDetail/ECS/ECS-80-12-33-JGN-TR?qs=d0WKAl%252BL4KaVcQK0q%252BTt4Q%3D%3D
Y2: "Crystal or Oscillator", Manufacturer_Name=ECS, Mouser Part Number=520-ECS-327-12.5-34B, Datasheet Link=https://componentsearchengine.com/Datasheets/1/ECS-.327-12.5-34B.pdf, Manufacturer_Part_Number=ECS-.327-12.5-34B, Mouser Price/Stock=https://www.mouser.co.uk/ProductDetail/ECS/ECS-.327-12.5-34B?qs=muFWWzTLGEJ4ncukpyY8Bw%3D%3D

## Via types
v1: diameter 50, hole 28, Top Layer to Bottom Layer, 2 vias

## Nets (pads, with @x,y where several pads share a name; then routed paths per layer and width w, separated by ;. In a path a pad name is that pad's centre, name@x,y a point inside that pad or via, vN(x,y) a via of type N, cw(c..) or ccw(c..) an arc to the next point about the centre after c; other vN are vias at no path point)
+24V: E1.A1 E1.A3 E1.B1 E1.B3 F6.2
B3_RX: Bluetooth1.3 IC3.53
B3_TX: Bluetooth1.4 IC3.54
"BOOT SEL": P2.2 R5.2
"CAN Rx": IC1.4 IC3.33
"CAN Tx": IC1.5 IC3.34
CAN_N: E1.A8 E1.B2 IC1.15 R1.1
CAN_P: E1.A6 E1.B4 IC1.17 S1.1
CANGND: C5.1 C6.1 C7.1 E1.A2 E1.B8 E1.S1 E1.S2 E1.S3 FB2.1 IC1.11 IC1.13 IC1.16 IC1.18 IC1.20 S1.MH1 S1.MH2 S1.MH3 S1.MH4
CS_IMU: IC3.26 IMU1.3
CS_SD: IC3.25 SD1.3
Enable: Bluetooth1.1 IC3.52
GND: Bluetooth1.5 C1.1 C2.1 C3.1 C4.1 C9.2 C10.1 C11.1 C12.1 C13.1 C14.1 C15.1 C16.1 C17.1 C18.1 C19.1 C20.1 C21.1 C22.1 C23.1 C24.1 C25.2 C26.1 C27.1 C29.1 C30.2 C31.1 D1.1 E1.A5 E1.A7 E1.B5 E1.B7 GPS1.8 GPS2.8 IC1.1 IC1.3 IC1.7 IC1.9 IC1.10 IC3.12 IC3.18 IC3.31 IC3.47 IC3.63 IC4.4 IC4.7 IC4.9 IMU1.8 IMU2.1 IMU2.8 LED1.1 P1.3 P2.1 P3.2 P3.16 R4.1 RST1.1 RST1.2 SD1.8 SD2.8 SUSP1.3 SUSP2.3 TVS1.2 USB1.5
GPS_RX: GPS2.4 IC3.14
GPS_TX: GPS2.3 IC3.15
"HSE IN": IC3.5 Y1.1
"HSE OUT": IC3.6 Y1.3
"LSE IN": C18.2 IC3.3 Y2.2
"LSE OUT": C21.2 IC3.4 Y2.1
MISO: IC3.22 IMU1.5 P3.13 SD1.5
MOSI: IC3.23 IMU1.6 P3.14 SD1.6
NetBluetooth1_6: Bluetooth1.6 F5.2
NetC8_1: C8.1 FB2.2
NetC10_2: C10.2 Y1.4
NetC11_2: C11.2 Y1.2
NetC12_2: C12.2 IC3.30
NetC28_1: C28.1 C29.2 IC4.2 IC4.3 L1.2
NetC28_2: C28.2 IC4.1
NetC31_2: C31.2 IC4.8
NetD1_2: D1.2 R3.2
NetF1_2: F1.2 GPS1.7
NetF2_2: F2.2 GPS2.7
NetF3_2: F3.2 SD1.7
NetF4_2: F4.2 IMU1.7
NetF6_1: F6.1 R7.1
NetIC3_60: IC3.60 R5.1
NetIC4_6: IC4.6 R8.2
NetIC4_10: IC4.10 R7.2
NetLED1_2: LED1.2 R2.1
NetLED2_1: LED2.1 R4.2
NetR1_2: R1.2 S1.3
NetR9_2: R9.2 TVS1.6
NetR10_2: R10.2 TVS1.4
NRST: C17.2 IC3.7 P1.5 RST1.3 RST1.4
PA4: IC3.20 P3.8
PA8: IC3.41 P3.5 | length 670.1
  Top Layer w5: IC3.41 4593.23,3303.23 P3.5
PA9: IC3.42 P3.4 | length 816
  Top Layer w5: IC3.42 4575,3322.91 4575,3344.44 4739.1,3508.53 4757.97,3508.53 4804.44,3555 P3.4
PA10: IC3.43 P3.3 | length 695.2
  Top Layer w5: IC3.43 4532.6,3342.6 P3.3
PB6: IC3.58 P3.7
PC6: IC3.37 P3.11 | length 636
  Top Layer w5: IC3.37 4565.12,3224.49 4634.6,3155 P3.11
PC7: IC3.38 P3.10 | length 737.6
  Top Layer w5: IC3.38 4640.83,3244.17 4672.03,3212.97 4802.97,3212.97 P3.10
PC8: IC3.39 P3.9 | length 610.9
  Top Layer w5: IC3.39 4736.14,3263.86 P3.9
PC9: IC3.40 P3.6 | length 778.3
  Top Layer w5: IC3.40 4606.89,3283.54 4725,3401.65 4751.09,3401.65 4804.44,3455 P3.6
SCLK: IC3.21 IMU1.4 P3.12 SD1.4
State: Bluetooth1.2 LED2.2
SUSP1: IC3.27 SUSP1.2
SUSP2: IC3.9 SUSP2.2
SWO: IC3.55 P1.6
TCK: IC3.49 P1.2
TMS: IC3.46 P1.4
USB1_N: TVS1.1 USB1.2
USB1_P: TVS1.3 USB1.3
USB2_N: IC3.44 R9.1
USB2_P: IC3.45 R10.1
"USER LED": IC3.36 R2.2
VCC: C3.2 C4.2 C27.2 C30.1 F2.1 F5.1 IC1.8 IC2.4 IC4.5 L1.1 P3.1 R3.1 R8.1 TVS1.5 USB1.1
  other v1: 6934.32,5745 7230.01,5885.01
VIO: C1.2 C2.2 C9.1 C13.2 C14.2 C15.2 C16.2 C19.2 C20.2 C22.2 C23.2 C24.2 C25.1 C26.2 F1.1 F3.1 F4.1 IC1.6 IC2.6 IC2.7 IC3.1 IC3.13 IC3.19 IC3.32 IC3.48 IC3.64 P1.1 P2.3 P3.15 SUSP1.1 SUSP2.1
VISOIN: C5.2 C6.2 C8.2 FB1.2 IC1.19
VISOOUT: C7.2 FB1.1 IC1.12
pads on no net: E1.A4 E1.B6 E1.MH1 E1.MH2 GPS1.1 GPS1.2 GPS1.3 GPS1.4 GPS1.5 GPS1.6 GPS2.1 GPS2.2 GPS2.5 GPS2.6 IC1.2 IC1.14 IC2.1 IC2.2 IC2.3 IC2.5 IC2.8 IC3.2 IC3.8 IC3.10 IC3.11 IC3.16 IC3.17 IC3.24 IC3.28 IC3.29 IC3.35 IC3.50 IC3.51 IC3.56 IC3.57 IC3.59 IC3.61 IC3.62 IC4.11 IMU1.1 IMU1.2 IMU2.2 IMU2.3 IMU2.4 IMU2.5 IMU2.6 IMU2.7 S1.2 S1.4 SD1.1 SD1.2 SD2.1 SD2.2 SD2.3 SD2.4 SD2.5 SD2.6 SD2.7 SUSP1.MH1 SUSP2.MH1 USB1. USB1.4

## Polygon pours and split planes (outlines as drawn)
GND on Bottom Layer "Bottom Layer-GND" (solid, pour order 0): 1085,4960 1115,4990 6970,4990 6970,1035 6965,1040 1050,1040

## Text inside footprints (layer, text, board x,y; h text height)
P3: Top Overlay "2" at 4825,3755 h50 r270; Top Overlay "1" at 4725,3755 h50 r270; Top Overlay "15" at 4725,2895 h50 r270; Top Overlay "16" at 4825,2895 h50 r270